# Altium PCB 400342.PcbDoc
Units mm, origin at the board's own origin, x right, y up, seen from the top; angles counter-clockwise.
Board outline 64.3 x 23.1 mm, 2 copper layers (Top Layer, Bottom Layer), stack 1.271 mm thick; 34 components, 50 nets, 191 pads, 142 vias.
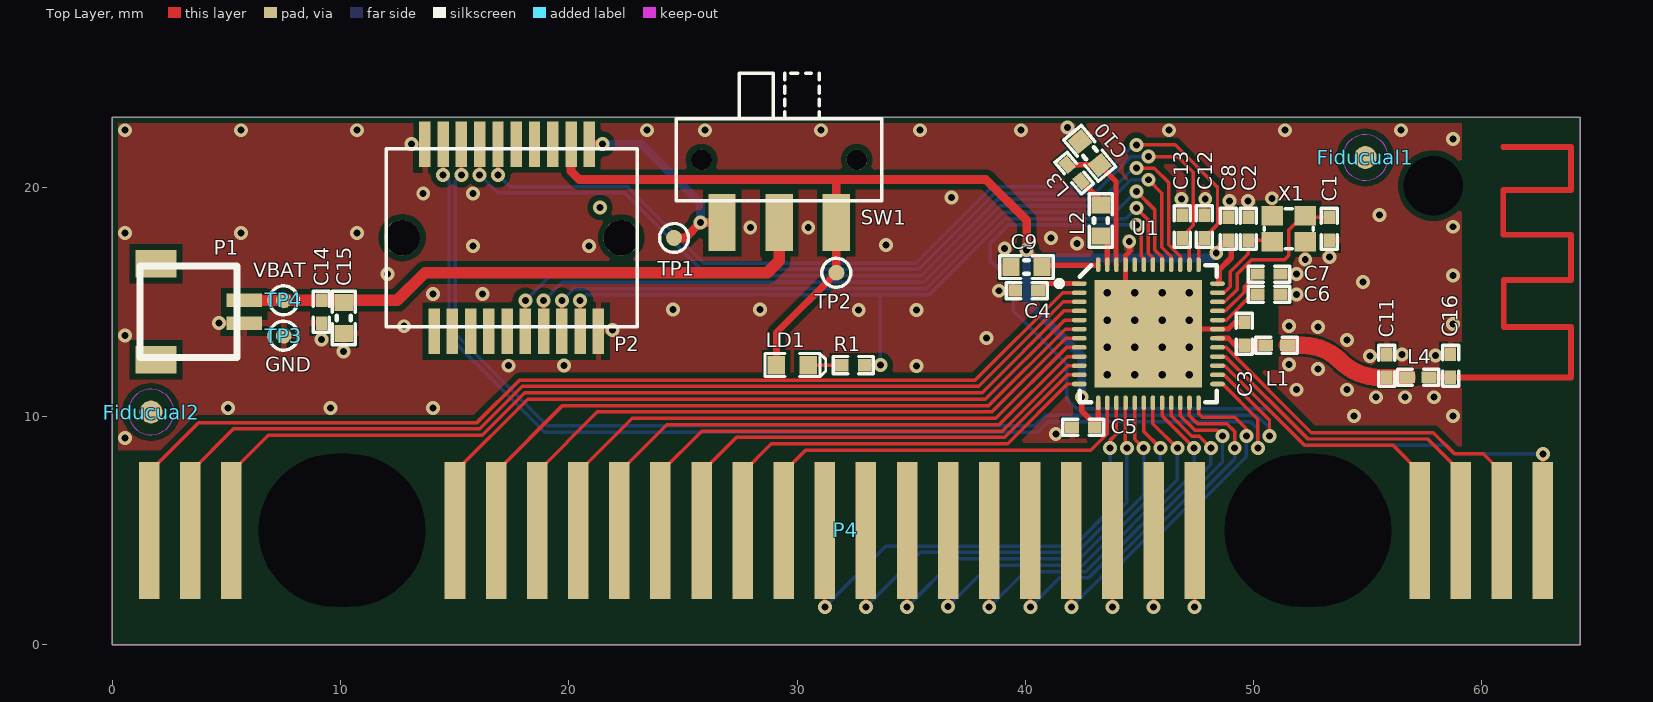
[diagram p0: Top Layer view]
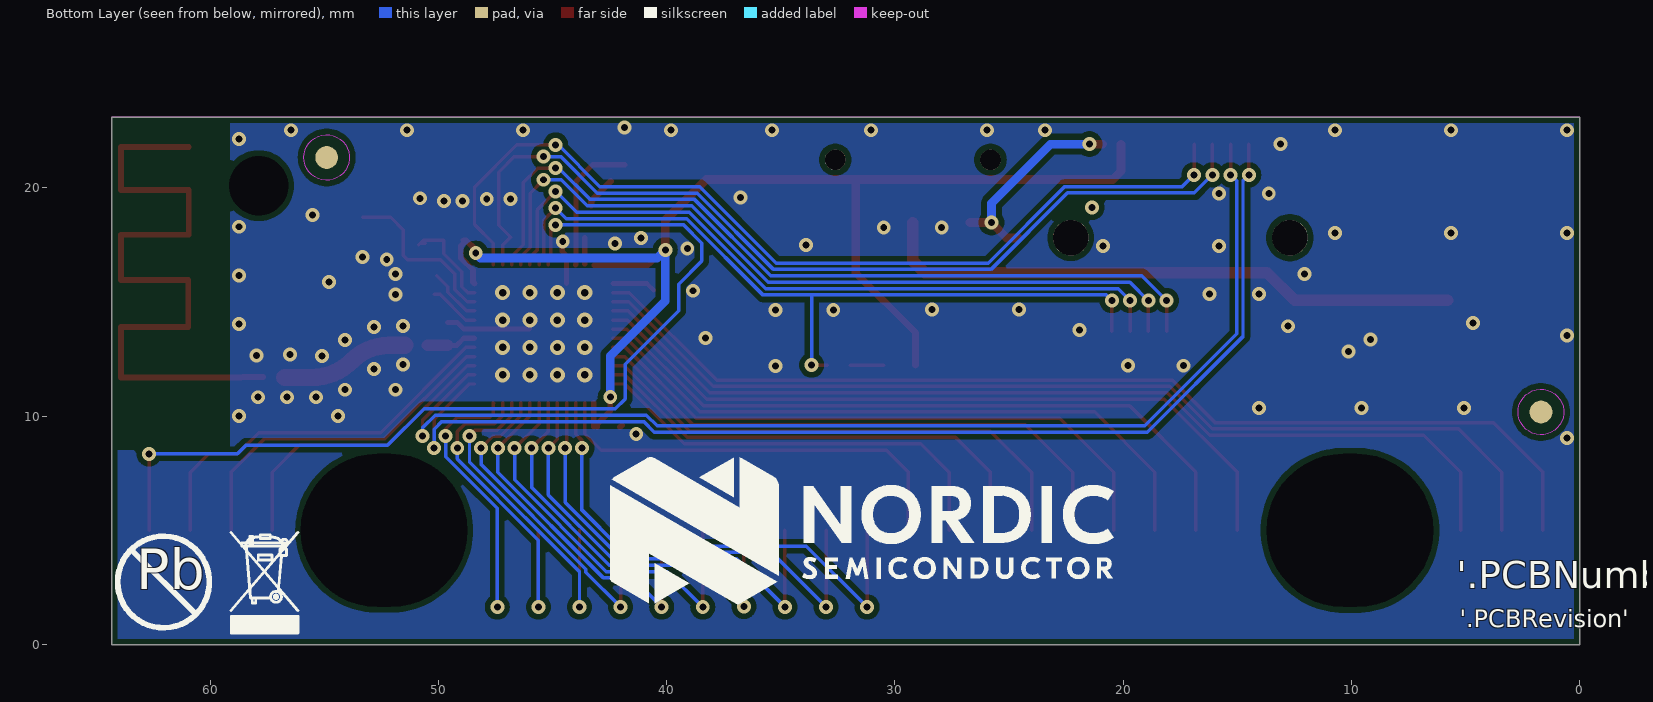
[diagram p1: Bottom Layer view, seen from below]
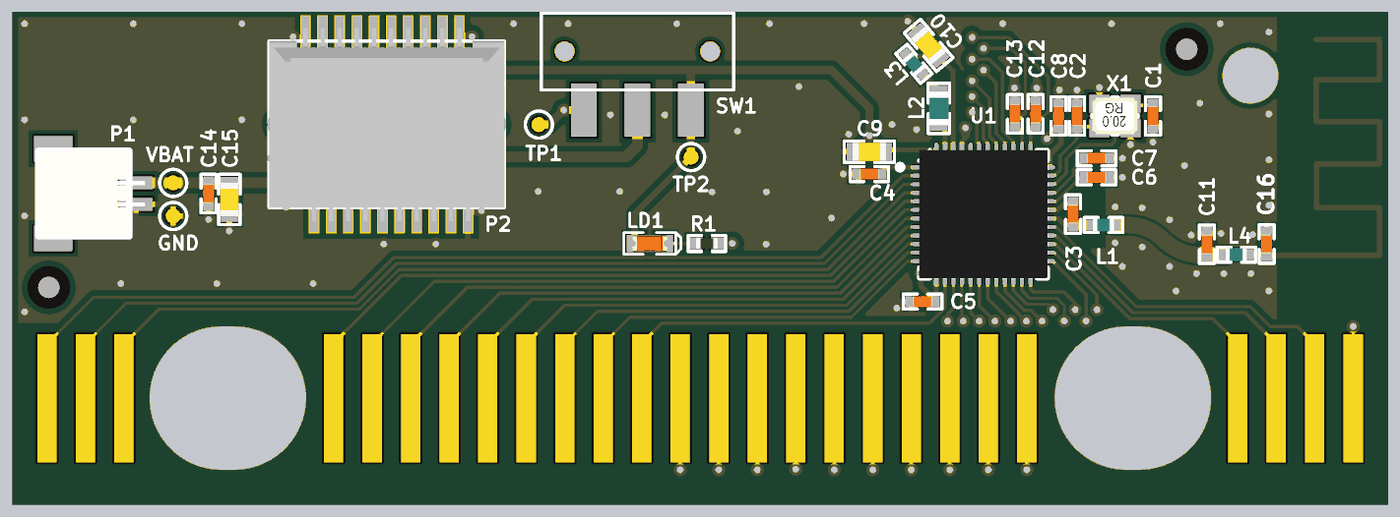
[diagram p2: 3D render of the assembled board from above, using the file's embedded part models]

## Layer stack, top to bottom
Top Solder: solder mask 0.0102, Solder Resist, Dk 3.5
Top Layer: signal copper 0.0356
Dielectric 1: dielectric 1.2, FR-4, Dk 4.8
Bottom Layer: signal copper 0.0356
Bottom Solder: solder mask 0.0102, Solder Resist, Dk 3.5

## Board outline
0,0 0,23.1 64.3,23.1 64.3,0

## Design rules (kind name [scope] priority, off if disabled: settings)
Clearance ANT_Clearance [InNet('ANT') or InNet('RF')] p1: gap=0.127 ignorepadtopadclearanceinfootprint=FALSE
Clearance Polygon_Clearance [(InNamedPolygon('Top_Layer-GND')) or (InNamedPolygon('Bottom_Layer-GND'))] p2: gap=0.254 ignorepadtopadclearanceinfootprint=FALSE except(0: Arc-Hole Track-Hole SMDPad-Hole THPad-Hole Via-Hole Fill-Hole Poly-Hole Region-Hole Text-Hole)
Clearance [All] p3: gap=0.127 ignorepadtopadclearanceinfootprint=FALSE except(0: Arc-Hole Track-Hole SMDPad-Hole THPad-Hole Via-Hole Fill-Hole Poly-Hole Region-Hole Text-Hole)
ComponentClearance [All] p1 off: gap=0.254 collisioncheckmode=3 verticalgap=0.254 showdistances=FALSE
DiffPairsRouting [All] p1: maxlimit=0.254 minlimit=0.19 mostfreqgap=0.193 toplayer_minwidth=0.165 toplayer_maxwidth=0.165 toplayer_prefwidth=0.165 bottomlayer_minwidth=0.165 bottomlayer_maxwidth=0.165 bottomlayer_prefwidth=0.165 maxuncoupledlength=12.7
HoleSize [All] p1: absolutevalues=TRUE maxlimit=7.62 minlimit=0.1 maxpercent=80.000 minpercent=20.000
MinimumAnnularRing [All] p1 off: minimumring=0.152
MinimumSolderMaskSliver [All] p1 off: minsoldermaskwidth=0.254
NetAntennae [All] p1 off: netantennaetolerance=0
PolygonConnect PolygonConnect_1 [isVia and innet(gnd)] p1: connectstyle=Direct reliefconductorwidth=0.254 reliefentries=4 polygonreliefangle="90 Angle" airgapwidth=0.254
PolygonConnect [All] p2: connectstyle=Relief reliefconductorwidth=0.254 reliefentries=4 polygonreliefangle="90 Angle" airgapwidth=0.254
RoutingVias [All] p1: holewidth=0.305 width=0.61 viastyle="Through Hole" minholewidth=0.1 minwidth=0.3 maxholewidth=0.33 maxwidth=1
SilkToSilkClearance [All] p1 off: silktosilkclearance=0.254
SilkToSolderMaskClearance [IsPad] p1 off: minsilkscreentomaskgap=0.254 clearancetoexposedcopper=TRUE
SolderMaskExpansion [All] p1: expansion=0.102
Width [All] p1: maxlimit=20 minlimit=0.1 preferedwidth=0.127 minimp=50.000000 maximp=50.000000 favimp=50.000000
23 further rules are at their usual default settings.

## Components (designator, comment, footprint, x,y, rotation, side; value= is the part's Value field where it differs from the comment)
C1 "12pF" CAPC1005X04L 53.312,18.211 r270 top
C2 "12pF" CAPC1005X04L 49.756,18.211 r90 top
C3 "0.8pF" CAPC1005X04L 49.578,13.613 r270 top
C4 "100nF" CAPC1005X04L 40.053,15.493 r180 top
C5 "100nF" CAPC1005X04L 42.542,9.524 r180 top
C6 "N.C." CAPC1005X04L 50.67,15.341 r180 top
C7 "100pF" CAPC1005X04L 50.67,16.23 r0 top
C8 "100nF" CAPC1005X04L 48.892,18.211 r90 top
C9 "4.7µF" CAPC1608X06L 40.053,16.534 r180 top
C10 "1.0µF" CAPC1608X06L 42.822,21.518 r310 top
C11 "1.2pF" CAPC1005X04L 55.832,12.206 r90 top
C12 "12pF" CAPC1005X04L 47.827,18.311 r90 top
C13 "12pF" CAPC1005X04L 46.862,18.311 r90 top
C14 "100nF" CAPC1005X04L 9.168,14.578 r90 top
C15 "1.0µF" CAPC1608X06L 10.143,14.303 r90 top
C16 "N.C." CAPC1005X04L 58.622,12.214 r270 top
Fiducual1 "Fiducial mark" Fiducial 54.889,21.336 r90 top
Fiducual2 "Fiducial mark" Fiducial 1.702,10.185 r90 top
L1 "3.9nH" INDC1005X04L 51,13.105 r0 top
L2 "10µH" INDC1608X06L 43.304,18.572 r270 top
L3 "15nH" INDC1005X04L 42.137,20.654 r310 top
L4 "1.5nH" INDC1005X04L 57.205,11.714 r0 top
LD1 "L0603R" LED_0603_R 29.794,12.243 r180 top
P1 "HDR-2, 1mm" SM02B-SRSS-TB 5.788,14.579 r270 top
P2 "Card Edge, 0.8mm" 10056847-101LF 17.499,17.82 r180 top
P4 "KBRFBE71_Keyboard_Connector" KBRFBE71_Keyboard_Connector 1.616,5 r0 top locked
R1 "100R" RESC1005X04L 32.461,12.243 r180 top
SW1 "Switch" JS102011SAQN 29.214,21.233 r180 top
TP1 "Ø0.7mm,SMD" TP_SMD_Ø0.7mm 24.608,17.81 r90 top
TP2 "Ø0.7mm,SMD" TP_SMD_Ø0.7mm 31.72,16.286 r90 top
TP3 "GND" TP_SMD_Ø0.7mm 7.516,13.529 r90 top value=Ø0.7mm,SMD
TP4 "VBAT" TP_SMD_Ø0.7mm 7.516,15.078 r90 top value=Ø0.7mm,SMD
U1 "nRF52832-QFAAE0" QFN40P600X600X90-48N 45.387,13.613 r0 top
X1 "32MHz" BT-XTAL_2016 51.534,18.211 r180 top

## Footprints (in the part's own frame and the unit in brackets; to place one, negate y for a bottom-side part, rotate by r counter-clockwise, add the part's x,y. Pads: shape width x height; smd on the part's side, far side on the other; paste and mask are expansions set on the pad)
10056847-101LF [mm]
  rect 0.5x2 smd paste-0.05 mask+0.025: 1(-3.4,-4.1) 2(-2.6,-4.1) 3(-1.8,-4.1) 4(-1,-4.1) 5(-0.2,-4.1) 6(0.6,-4.1) 7(1.4,-4.1) 8(2.2,-4.1) 9(3,-4.1) 10(3.8,-4.1) 11(3.4,4.1) 12(2.6,4.1) 13(1.8,4.1) 14(1,4.1) 15(0.2,4.1) 16(-0.6,4.1) 17(-1.4,4.1) 18(-2.2,4.1) 19(-3,4.1) 20(-3.8,4.1)
  round 1.55 hole 1.55 unplated mask+0: ""(-4.8,0) ""(4.8,0)
  silkscreen extent -5.5,-3.9 5.5,3.9, body extent -5.5,-4.5 5.5,4.53, height 5.28
BT-XTAL_2016 [mm] "Crystal 2.0 x 1.6 mm"
  rect 0.95x0.85 smd: 1(-0.725,-0.575) 2(0.725,-0.575) 3(0.725,0.575) 4(-0.725,0.575)
  silkscreen extent -1.08,-0.88 1.08,0.88, body extent -1.05,-0.85 1.05,0.85, height 0.56
CAPC1005X04L [mm] "Chip Capacitor, 2-Leads, Body 1.0x0.5mm, IPC High Density"
  rect 0.6x0.5 smd: 1(-0.5,0) 2(0.5,0)
  silkscreen extent -0.9,-0.35 0.9,0.35, body extent -0.51,-0.25 0.51,0.25, height 0.5
CAPC1608X06L [mm] "Chip Capacitor, 2-Leads, Body 1.6x0.8mm, IPC High Density"
  rect 0.75x0.8 smd: 1(-0.675,0) 2(0.675,0)
  silkscreen extent -1.17,-0.5 1.17,0.5, body extent -0.8,-0.43 0.8,0.43, height 0.8
Fiducial [mm] "Fiducial Mark"
  round 1 smd paste+0 mask+0.5: 0(0,0)
  round 1 smd far side paste+0 mask+0.5: 0(0,0)
  Top Layer keep-out circle w0.01: c0,0 r1
  Bottom Layer keep-out circle w0.01: c0,0 r1
INDC1005X04L [mm] "Chip Inductor, 2-Leads, Body 1.0x0.5mm, IPC High Density"
  rect 0.65x0.5 smd: 1(-0.475,0) 2(0.475,0)
  silkscreen extent -0.9,-0.35 0.9,0.35, body extent -0.5,-0.3 0.5,0.3, height 0.5
INDC1608X06L [mm] "Chip Inductor, 2-Leads, Body 1.6x0.8mm, IPC High Density"
  rect 0.75x0.8 smd: 1(-0.675,0) 2(0.675,0)
  silkscreen extent -1.17,-0.5 1.17,0.5, body extent -0.8,-0.48 0.8,0.48, height 0.8
JS102011SAQN [mm] "Slide Switches - SPDT, SMD, ON-ON"
  round 0.9 hole 0.9: 0(-3.4,0) 0(3.4,0)
  rect 1.2x2.5 smd: 1(-2.5,2.75) 2(0,2.75) 3(2.5,2.75)
  silkscreen extent -4.5,-3.8 4.5,1.8, body extent -4.52,-3.8 4.52,3.75, height 3.5
KBRFBE71_Keyboard_Connector [mm]
  rect 0.9x6 smd paste-0.508: 1(0,0) 2(1.8,0) 3(3.6,0) 4(13.4,0) 5(15.2,0) 6(17,0) 7(18.8,0) 8(20.6,0) 9(22.4,0) 10(24.2,0) 11(26,0) 12(27.8,0) 13(29.6,0) 14(31.4,0) 15(33.2,0) 16(35,0) 17(36.8,0) 18(38.6,0) 19(40.4,0) 20(42.2,0) 21(44,0) 22(45.8,0) 23(55.654,0) 24(57.454,0) 25(59.254,0) 26(61.054,0)
  rect 0.9x6 on Mech9 paste-0.508: 1(0,0) 2(1.8,0) 3(3.6,0) 4(13.4,0) 5(15.2,0) 6(17,0) 7(18.8,0) 8(20.6,0) 9(22.4,0) 10(24.2,0) 11(26,0) 12(27.8,0) 13(29.6,0) 14(31.4,0) 15(33.2,0) 16(35,0) 17(36.8,0) 18(38.6,0) 19(40.4,0) 20(42.2,0) 21(44,0) 22(45.8,0) 23(55.654,0) 24(57.454,0) 25(59.254,0) 26(61.054,0)
LED_0603_R [mil] "SMD Super Bright LED, RED"
  rect 30x32 smd: 1(-27.5,0) 2(27.5,0)
  silkscreen extent -58,-20 48,20, body extent -32,-16 32,16, height 24
QFN40P600X600X90-48N [mm] "QFN, 48-Leads, Body 6,0x6,0mm (max), Pitch 0,40mm, IPC Medium Density"
  oval 0.65x0.2 smd mask+0.05: 1(-3.025,2.2) 2(-3.025,1.8) 3(-3.025,1.4) 4(-3.025,1) 5(-3.025,0.6) 6(-3.025,0.2) 7(-3.025,-0.2) 8(-3.025,-0.6) 9(-3.025,-1) 10(-3.025,-1.4) 11(-3.025,-1.8) 12(-3.025,-2.2) 25(3.025,-2.2) 26(3.025,-1.8) 27(3.025,-1.4) 28(3.025,-1) 29(3.025,-0.6) 30(3.025,-0.2) 31(3.025,0.2) 32(3.025,0.6) 33(3.025,1) 34(3.025,1.4) 35(3.025,1.8) 36(3.025,2.2)
  oval 0.2x0.65 smd mask+0.05: 13(-2.2,-3.025) 14(-1.8,-3.025) 15(-1.4,-3.025) 16(-1,-3.025) 17(-0.6,-3.025) 18(-0.2,-3.025) 19(0.2,-3.025) 20(0.6,-3.025) 21(1,-3.025) 22(1.4,-3.025) 23(1.8,-3.025) 24(2.2,-3.025) 37(2.2,3.025) 38(1.8,3.025) 39(1.4,3.025) 40(1,3.025) 41(0.6,3.025) 42(0.2,3.025) 43(-0.2,3.025) 44(-0.6,3.025) 45(-1,3.025) 46(-1.4,3.025) 47(-1.8,3.025) 48(-2.2,3.025)
  rect 4.7x4.7 smd: 49(0,0)
  silkscreen extent -4.02,-3 3,3, body extent -3.02,-3.02 3.02,3.02, height 0.86
RESC1005X04L [mm] "Chip Resistor, 2-Leads, Body 1.0x0.5mm, IPC High Density"
  rect 0.6x0.55 smd: 1(-0.5,0) 2(0.5,0)
  silkscreen extent -0.87,-0.38 0.88,0.38, body extent -0.5,-0.25 0.5,0.25, height 0.3
SM02B-SRSS-TB [mm] "JST, SH connector, side entry SMD, 1mm pitch"
  rect 1.2x1.8 smd: 0(-2.1,-3.875) 0(2.1,-3.875)
  rect 0.6x1.55 smd: 1(-0.5,0) 2(0.5,0)
  silkscreen extent -2,-4.57 2,-0.33, body extent -1.99,-4.58 1.99,0.41, height 3
TP_SMD_Ø0.7mm [mm]
  round 0.7 smd paste-5: 1(0,0)
  silkscreen extent -0.63,-0.64 0.63,0.63

## Part data
C1 C2 C12 C13: library part C0402-12p, "Capacitor, NP0, ±2%", Part number IPS=00000002398, Artikkelnr Noca=20029159, ComponentLink1Description=Datasheet, ComponentLink2Description="Supplier link", Footprint Doc=0402, LatestRevisionDate=2011-05-11, Note=50V, Part Number=C0402-12p, Pin Count=2, Published=2009-05-08, Publisher="Nordic Semiconductor"
C3: library part C0402-0.8p, "Capacitor, NP0, ±5%", Part number IPS=00000007782, Artikkelnr Noca=20029147, ComponentLink1Description=Datasheet, ComponentLink2Description="Supplier link", Footprint Doc=0402, LatestRevisionDate=2012-11-21, Note=50V, Part Number=C0402-0.8p, Pin Count=2, Published=2009-05-08, Publisher="Nordic Semiconductor"
C4 C5 C8 C14: library part C0402-100n, "Capacitor, X7R, ±10%", Part number IPS=00000005296, Artikkelnr Noca=20039200, ComponentLink1Description=Datasheet, ComponentLink2Description="Supplier link", Footprint Doc=0402, LatestRevisionDate=2009-11-23, Note=16V, Part Number=C0402-100n, Pin Count=2, Published=2009-05-08, Publisher="Nordic Semiconductor"
C6 C16: library part C0402-N.C., "Not mounted", Part number IPS=N.A., Artikkelnr Noca=N.A., Assembly="Not mounted", ComponentLink1Description=Datasheet, ComponentLink2Description="Supplier link", Footprint Doc=0402, LatestRevisionDate=2009-05-08, Note="Chip Cap", Part Number=C0402-N.C., Pin Count=2, Published=2009-05-08, Publisher="Nordic Semiconductor"
C7: library part C0402-100p, "Capacitor, NP0, ±5%", Part number IPS=00000002361, Artikkelnr Noca=20029135, ComponentLink1Description=Datasheet, ComponentLink2Description="Supplier link", Footprint Doc=0402, LatestRevisionDate=2009-05-08, Note=50V, Part Number=C0402-100p, Pin Count=2, Published=2009-05-08, Publisher="Nordic Semiconductor"
C9: library part C0603-4µ7, "Capacitor, X5R, ±10%", Part number IPS=00000007783, Artikkelnr Noca=20069060, ComponentLink1Description=Datasheet, ComponentLink2Description="Supplier link", Footprint Doc=0603, LatestRevisionDate=2009-11-23, Note=6.3V, Part Number=C0603-4µ7, Pin Count=2, Published=2009-05-08, Publisher="Nordic Semiconductor"
C10 C15: library part C0603-1µ0, "Capacitor, X7R, ±10%", Part number IPS=00000000616, Artikkelnr Noca=20039282, ComponentLink1Description=Datasheet, ComponentLink2Description="Supplier link", Footprint Doc=0603, LatestRevisionDate=2013-06-05, Note=16V, Part Number=C0603-1µ0, Pin Count=2, Published=2009-05-08, Publisher="Nordic Semiconductor"
C11: library part C0402-1.2p, "Capacitor, NP0, ±0.1pF", Part number IPS=00000005410, Artikkelnr Noca=20029157, ComponentLink1Description=Datasheet, ComponentLink2Description="Supplier link", Footprint Doc=0402, LatestRevisionDate=2011-05-11, Note=50V, Part Number=C0402-1.2p, Pin Count=2, Published=2009-05-08, Publisher="Nordic Semiconductor"
Fiducual1 Fiducual2: library part Fid-Mark, "Fiducial Mark", Part number IPS=N.A., Artikkelnr Noca=N.A., ComponentLink1Description=Datasheet, ComponentLink2Description="Supplier link", Footprint Doc=Fiducial, LatestRevisionDate=2009-12-12, Part Number=Fid-Mark, Pin Count=1, Published=2009-12-12, Publisher="Nordic Semiconductor"
L1: library part L0402-3n9, "Inductor, 170mA, ±0.1nH", Manufacturer=Murata, Manufacturer Part Number=LQP15MN3N9B02D, Part number IPS=00000007793, Supplier Part Number 1=490-1131-1-ND, Artikkelnr Noca=33029151, ComponentLink1Description=Datasheet, ComponentLink2Description="Supplier link", Footprint Doc=0402, HelpURL=http://search.murata.co.jp/Ceramy/image/img/PDF/ENG/L0075S0084LQP15M.pdf, LatestRevisionDate=2012-09-19, Note="High frequency chip inductor ±5%", Part Number=L0402-3n9, Pin Count=2, Published=2009-05-08, Publisher="Nordic Semiconductor", Supplier 1=Digi-Key
L2: library part L0603-10µ, "Inductor, 80mA, ±10%", Manufacturer="Taiyo Yuden", Manufacturer Part Number=LBMF1608T100K, Part number IPS=00000007794, Supplier Part Number 1=587-1714-1-ND, Artikkelnr Noca=33029314, ComponentLink1Description=Datasheet, ComponentLink2Description="Supplier link", Footprint Doc=0603, HelpURL=http://www.yuden.co.jp/ut/product/pdf/elb2_e.pdf, LatestRevisionDate=2012-09-19, Note="LBMF1608T100K 10µH 80mA 0603", Part Number=L0603-10µ, Pin Count=2, Published=2010-02-24, Publisher="Nordic Semiconductor", Supplier 1=Digi-Key, Supplier 2=Farnell, Supplier Part Number 2=178-6105
L3: library part L0402-15n, "Inductor, 320mA, ±5%", Manufacturer="Taiyo Yuden", Manufacturer Part Number=HK100515NJ-T, Part number IPS=00000001262, Supplier Part Number 1=587-1521-1-ND, Artikkelnr Noca=33029323, ComponentLink1Description=Datasheet, ComponentLink2Description="Supplier link", Footprint Doc=0402, HelpURL=http://www.yuden.co.jp/productdata/catalog/en/mlci04_e.pdf, LatestRevisionDate=2012-09-19, Note="High frequency chip inductor ±10%", Part Number=L0402-15n, Pin Count=2, Published=2010-07-12, Publisher="Nordic Semiconductor", Supplier 1=Digi-Key, Supplier 2=Farnell, Supplier Part Number 2=658-1328
L4: library part L0402-1n5, "Inductor, 280mA, ±0.1nH", Manufacturer=Murata, Manufacturer Part Number=LQP15MN1N5B02D, Part number IPS=N.A., Supplier Part Number 1=490-1126-1-ND, Artikkelnr Noca=N.A., ComponentLink1Description=Datasheet, ComponentLink2Description="Supplier link", Footprint Doc=0402, HelpURL=http://search.murata.co.jp/Ceramy/image/img/PDF/ENG/L0075S0084LQP15M.pdf, LatestRevisionDate=2012-09-19, Note="High frequency chip inductor ±5%", Part Number=L0402-1n5, Pin Count=2, Published=2009-05-08, Publisher="Nordic Semiconductor", Supplier 1=Digi-Key
LD1: library part EL19-21SURC, "LED 0603, EL19-21SURC", Manufacturer=Everlight, Manufacturer Part Number=EL-19-21SURC/S530-A2/TR8, Part number IPS=N.A., Supplier Part Number 1=638-192SURCS530-A2, Artikkelnr Noca=13019043, ComponentLink1Description=Datasheet, ComponentLink2Description="Supplier link", Footprint Doc=0603, HelpURL=http://media.digikey.com/pdf/Data%20Sheets/Everlight%20PDFs/19-21SURC,S530-A3,TR8.pdf, LatestRevisionDate=2013-06-04, Note="39 mcd @ 20 mA", Part Number=EL19-21SURC, Pin Count=2, Published=2009-05-18, Publisher="Nordic Semiconductor", Supplier 1=Mouser
P1: library part SM02B-SRSS-TB, "1.0mm pitch connector side entry SMD", Manufacturer=JST, Manufacturer Part Number=SM02B-SRSS-TB(LF)(SN), Part number IPS=00000007791, Supplier Part Number 1=455-1802-1-ND, Artikkelnr Noca=55010030, ComponentLink1Description=Datasheet, ComponentLink2Description="Supplier link", Footprint Doc=SM02B-SRSS-TB, HelpURL=http://www.jst-mfg.com/product/pdf/eng/eSH.pdf, LatestRevisionDate=2016-06-20, Note="JST, Header", Part Number=SM02B-SRSS-TB, Pin Count=2, Published=2016-06-20, Publisher="Nordic Semiconductor", Supplier 1=Digi-Key
P2: library part 10056847-101LF, "0.8mm pitch, dual edge, right angle, SMD, card edge connector", Manufacturer=FCI, Part number IPS=N.A., Supplier Part Number 1=609-4943-1-ND, Artikkelnr Noca=N.A., ComponentLink1Description=Datasheet, ComponentLink1URL=https://www.amphenol-icc.com/media/wysiwyg/files/drawing/10056847.pdf, ComponentLink2Description="Supplier link", Footprint Doc=10056847-101LF, LatestRevisionDate=2018-05-07, Manufacturer Part Number=10056847-101LF, Part Number=10056847-101LF, Pin Count=20, Published=2018-05-07, Publisher="Nordic Semiconductor", Supplier 1=Digi-Key
P4: "KBRFBE71 Keyboard Connector", Part number IPS=N.A., Artikkelnr Noca=N.A., ComponentLink1Description=Datasheet, Footprint Doc=KBRFBE71_Keyboard_Connector, LatestRevisionDate=2018-12-12, Note="KBRFBE71 Keyboard Connector", Part Number=KBRFBE71_Keyboard_Connector, Pin Count=26, Published=2018-12-12, Publisher="Nordic Semiconductor"
R1: library part R0402-100, "Resistor, ±1%, 0.063W", Part number IPS=00000002811, Supplier Part Number 1=173-8837, Artikkelnr Noca=27049049, ComponentLink1Description=Datasheet, ComponentLink2Description="Supplier link", Footprint Doc=0402, LatestRevisionDate=2009-11-23, Note="Chip Res 1%", Part Number=R0402-100, Pin Count=2, Published=2009-05-08, Publisher="Nordic Semiconductor", Supplier 1=Farnell
SW1: library part JS102011SAQN, "SMD slide Switch (ON-ON)", Manufacturer="C&K Components", Part number IPS=N.A., Supplier Part Number 1=401-1999-1-ND, Artikkelnr Noca=50019064, ComponentLink1Description=Datasheet, ComponentLink2Description="Supplier link", Footprint Doc=JS102011SAQN, HelpURL=http://www.ck-components.com/14398/js_14july11.pdf/, LatestRevisionDate=2011-08-15, Manufacturer Part Number=JS102011SAQN, Part Number=JS102011SAQN, Pin Count=3, Published=2011-08-15, Publisher="Nordic Semiconductor", Supplier 1=Digi-Key, Supplier 2=Mouser, Supplier Part Number 2=611-JS102011SAQN
TP1 TP2 TP3 TP4: library part TP_SMD_Ø0.7MM, "0.7mm circular SMD testpad", Manufacturer="Nordic Semiconductor", Part number IPS=N.A., Artikkelnr Noca=N.A., ComponentLink1Description=Datasheet, ComponentLink2Description="Supplier link", Footprint Doc=TP_SMD_Ø0.7mm, LatestRevisionDate=2017-12-14, Part Number=TP_SMD_Ø0.7MM, Pin Count=1, Published=2017-12-14, Publisher="Nordic Semiconductor"
U1: "Multi-protocol Bluetooth Low Energy, ANT and 2.4GHz proprietary system-on-chip", Manufacturer="Nordic Semiconductor", Part number IPS=N.A., Artikkelnr Noca=N.A., ComponentLink1Description=Datasheet, ComponentLink2Description="Supplier link", Footprint Doc=QFN-48, LatestRevisionDate=2017-10-18, Manufacturer Part Number=nRF52832-QFAAE0, Part Number=nRF52832-QFAAE0, Pin Count=48, Published=2017-10-18, Publisher="Nordic Semiconductor", Supplier 1="Nordic Semiconductor", Supplier Part Number 1=nRF52832-QFAAE0
X1: library part XTAL_SMD2016_32MHz_8pF_KDS, "XTAL SMD 2016, 32MHz, Cl=8pF, Tol: ±10ppm, Stab: ±20ppm", Manufacturer=KDS, Manufacturer Part Number=DSX211G, Part number IPS=N.A., Artikkelnr Noca=N.A., ComponentLink1Description=Datasheet, ComponentLink2Description="Supplier link", Footprint Doc=XTAL_2016, HelpURL=http://ftp.kds.info/products/DSX210GE_211G_car_en.pdf, LatestRevisionDate=2017-06-09, Note="XTAL SMD 32.000MHz", Part Number=XTAL_SMD2016_32MHz_8pF_KDS, Pin Count=4, Published=2017-06-09, Publisher="Nordic Semiconductor"

## Free pads (board coordinates)
  rect 1.524x1.524 hole 6.7 slot 7.3 at 0 deg: ""(10.068,5.003) ""(52.372,5.003)
  round 1.524 hole 2.6: ""(57.866,20.1)

## Via types
v1: diameter 0.61, hole 0.305, Top Layer to Bottom Layer, tented both sides, 126 vias
v2: diameter 0.66, hole 0.33, Top Layer to Bottom Layer, tented both sides, 16 vias

## Nets (pads, with @x,y where several pads share a name; then routed paths per layer and width w, separated by ;. In a path a pad name is that pad's centre, name@x,y a point inside that pad or via, vN(x,y) a via of type N, cw(c..) or ccw(c..) an arc to the next point about the centre after c; other vN are vias at no path point)
ANT: C16.2 L4.2 | length 31
  Top Layer w0.254: L4.2@57.679,11.723 C16.2@58.576,11.723 ; C16.2@58.626,11.698 63.896,11.698 63.896,13.915 60.953,13.915 60.953,15.973 63.896,15.973 63.896,17.954 60.927,17.954 60.927,19.91 63.896,19.91 63.896,21.789 60.932,21.789
DEC1: C4.1 U1.1 | length 1.9
  Top Layer w0.203: C4.1@40.557,15.512 40.858,15.813 U1.1
DEC2: C6.2 U1.32 | length 2.2
  Top Layer w0.152: U1.32 48.798,14.213 49.925,15.341 C6.2@50.188,15.341
DEC3: C7.1 U1.33 | length 2.4
  Top Layer w0.152: U1.33 48.767,14.613 49.578,15.424 49.578,15.676 C7.1@50.062,16.16
DEC4: C10.2 L3.1 U1.46 | length 6.1
  Top Layer w0.229: L3.1 C10.2@43.239,21.018 ; C10.2 43.971,20.286 43.971,16.654 U1.46
GND: C1.2 C2.2 C3.1 C4.2 C5.2 C6.1 C7.2 C8.2 C9.2 C10.1 C11.2 C12.2 C13.2 C14.1 C15.1 C16.1 P1.2 P2.10 P2.20 TP3.1 U1.31 U1.45 U1.49 X1.2 X1.4 | length 5.7
  Top Layer w0.229: U1.49@44.387,15.813 U1.45 44.387,17.033 44.574,17.22 v1@44.574,17.652 ; U1.49@46.005,13.817 48.886,13.817 49.173,14.104 C3.1@49.586,14.104
  Top Layer w0.254: C5.2@41.959,9.607 C5.2
  other v1: 0.569,9.041 41.331,9.219 54.385,10.013 58.728,10.016 5.065,10.362 9.56,10.362 14.056,10.362 55.352,10.834 56.622,10.834 57.892,10.834 51.883,11.163 54.082,11.163 52.812,12.074 17.356,12.214 19.794,12.216 35.233,12.204 51.542,12.267 55.098,12.635 57.966,12.655 56.493,12.706 10.133,12.834 9.168,13.367 54.082,13.347 38.291,13.437 0.569,13.54 21.922,13.782 52.812,13.906 12.786,13.944 51.542,13.957 58.728,14.033 4.672,14.078 32.7,14.655 35.24,14.655 24.572,14.68 28.382,14.68 51.881,15.341 14.054,15.363 16.213,15.363 38.841,15.498 54.791,15.887 58.728,16.167 12.065,16.23 51.881,16.23 52.259,16.874 53.312,16.982 39.095,17.353 15.809,17.449 20.889,17.449 33.894,17.5 42.263,17.576 44.549,17.652 41.116,17.811 0.569,18.033 5.649,18.033 10.729,18.033 27.95,18.262 30.49,18.262 58.728,18.3 55.502,18.808 48.944,19.428 49.757,19.428 46.836,19.522 47.878,19.522 50.809,19.548 36.764,19.582 13.624,19.76 15.809,19.76 13.116,21.919 58.728,22.136 0.569,22.529 5.649,22.529 10.729,22.529 23.429,22.529 25.969,22.529 31.049,22.529 35.392,22.529 39.812,22.529 46.289,22.529 51.369,22.529 56.449,22.529 41.85,22.645
  other v2: 43.587,11.813 44.787,11.813 45.987,11.813 47.187,11.813 43.587,13.013 44.787,13.013 45.987,13.013 47.187,13.013 43.587,14.213 44.787,14.213 45.987,14.213 47.187,14.213 43.587,15.413 44.787,15.413 45.987,15.413 47.187,15.413
NetC3_2: C3.2 L1.1 U1.30 | length 2.2
  Top Layer w0.229: U1.30 48.887,13.413 49.197,13.104 C3.2@49.586,13.104
  Top Layer w0.508: C3.2@49.578,13.109 L1.1@50.475,13.109
NetL2_1: L2.1 L3.2 | length 1.4
  Top Layer w0.279: L3.2 43.304,19.428 L2.1
NetL2_2: L2.2 U1.47 | length 1.1
  Top Layer w0.229: U1.47@43.587,16.669 L2.2@43.587,17.817
NetLD1_1: LD1.1 R1.2 | length 1.5
  Top Layer w0.152: LD1.1 R1.2
P0.25: C12.1 P2.6 U1.37 | length 41.1
  Top Layer w0.152: v1(16.899,20.574) P2.6 ; v1(44.858,21.884) 46.56,21.884 48.415,20.029 48.415,18.399 47.587,17.571 U1.37
  Bottom Layer w0.152: v1(16.899,20.574) 17.411,20.062 22.555,20.062 25.908,16.709 35.2,16.709 38.546,20.055 42.921,20.055 44.749,21.884 v1(44.858,21.884)
P0.26: C13.1 P2.7 U1.38 | length 41
  Top Layer w0.152: v1@16.099,20.574 P2.7 ; v1(45.391,21.376) 46.666,21.376 47.35,20.693 47.35,18.367 C13.1@46.819,17.836 ; C13.1 47.187,17.486 U1.38
  Bottom Layer w0.152: v1(16.097,20.574) 16.889,19.783 22.439,19.783 25.792,16.43 35.316,16.43 38.662,19.776 43.036,19.776 44.637,21.376 v1(45.391,21.376)
P0.27: P2.16 U1.39 | length 36
  Top Layer w0.152: P2.16 v1(18.099,15.067) ; v1(44.858,20.868) 45.645,20.868 46.274,20.239 46.274,17.518 46.787,17.006 U1.39
  Bottom Layer w0.152: v1(18.099,15.067) 19.183,16.151 35.432,16.151 38.778,19.497 43.352,19.497 44.724,20.868 v1(44.858,20.868)
P0.28: P2.17 U1.40 | length 34.2
  Top Layer w0.152: P2.17 v1(18.899,15.067) ; v1(45.391,20.36) 45.975,19.777 45.975,17.394 46.387,16.982 U1.40
  Bottom Layer w0.152: v1@18.874,15.041 v1(18.899,15.067) 19.704,15.871 35.547,15.871 38.893,19.217 43.468,19.217 44.611,20.36 v1(45.391,20.36)
P0.29: P2.18 U1.41 | length 32.2
  Top Layer w0.152: P2.18 v1(19.699,15.067) ; v1(44.858,19.852) 45.676,19.035 45.676,17.27 45.987,16.959 U1.41
  Bottom Layer w0.152: v1(19.699,15.067) 20.224,15.592 35.663,15.592 39.009,18.938 43.944,18.938 v1(44.858,19.852)
P0.30: P2.19 R1.1 U1.42 | length 33.9
  Top Layer w0.152: P2.19 v1(20.499,15.067) ; R1.1 v1(33.647,12.243) ; v1(44.858,19.116) 45.376,18.597 45.376,17.146 45.587,16.936 U1.42
  Bottom Layer w0.152: v1(20.499,15.067) 20.745,15.312 33.668,15.312 ; v1(33.647,12.243) 33.647,15.292 33.668,15.312 ; v1(44.858,19.116) 44.401,18.658 39.125,18.658 35.779,15.312 33.668,15.312
R0: P4.26@62.67,5 U1.43 | length 41.7
  Top Layer w0.152: v1@45.077,18.185 45.077,17.022 45.187,16.912 U1.43 ; P4.26@62.67,5 v1(62.67,8.353)
  Bottom Layer w0.152: v1(44.858,18.379) 39.255,18.379 38.459,17.582 38.459,16.802 39.475,15.786 39.475,14.617 41.812,12.28 41.812,10.757 42.242,10.327 50.622,10.327 52.225,8.724 58.425,8.724 58.797,8.353 v1(62.67,8.353)
R1: P4.25@60.87,5 U1.29 | length 17.3
  Top Layer w0.152: U1.29 48.798,13.013 52.528,9.283 57.866,9.283 58.797,8.353 60.053,8.353 60.87,7.537 P4.25@60.87,5
R2: P4.24@59.07,5 U1.28 | length 15.3
  Top Layer w0.152: U1.28 48.767,12.613 52.377,9.004 57.626,9.004 59.07,7.56 P4.24@59.07,5
R3: P4.23@57.27,5 U1.27 | length 13.3
  Top Layer w0.152: U1.27 48.736,12.213 52.225,8.724 56.1,8.724 57.27,7.555 P4.23@57.27,5
R4: P4.21@45.616,5 U1.23 | length 15.3
  Top Layer w0.152: v1(45.616,1.647) P4.21@45.616,5 ; U1.23 47.187,10.03 47.541,9.676 48.823,9.676 49.169,9.33 v1(49.169,8.61)
  Bottom Layer w0.152: v1(45.616,1.647) 45.616,4.575 49.169,8.128 v1(49.169,8.61)
R5: P4.22@47.416,5 U1.24 | length 14.9
  Top Layer w0.152: v1(47.416,1.647) P4.22@47.416,5 ; U1.24@47.573,10.574 U1.24 47.587,10.115 47.746,9.956 49.169,9.956 49.677,9.448 v1(49.677,9.143)
  Bottom Layer w0.152: v1(47.416,1.647) 47.416,5.968 49.677,8.229 v1(49.677,9.143)
R6: P4.20@43.816,5 U1.22 | length 15.6
  Top Layer w0.152: v1(43.816,1.647) P4.20@43.816,5 ; U1.22 46.787,10.026 47.416,9.397 48.381,9.397 v1(48.635,9.143)
  Bottom Layer w0.147: v1(43.816,1.647) 43.816,3.182 48.635,8.001 v1(48.635,9.143)
R7: P4.19@42.016,5 U1.21 | length 15.7
  Top Layer w0.152: v1(42.016,1.647) P4.19@42.016,5 ; U1.21 46.387,10.016 47.286,9.118 47.619,9.118 v1(48.127,8.61)
  Bottom Layer w0.152: v1(42.016,1.647) 43.539,3.17 43.539,3.297 48.127,7.886 v1(48.127,8.61)
RF: C11.1 L1.2 L4.1 | length 5.6
  Top Layer w0.762: L1.2 52.155,13.105 cw(c52.155,10.814) 53.775,12.434 ccw(c55.553,14.213) 55.553,11.698 L4.1@56.729,11.698
S0: P4.18@40.216,5 U1.20 | length 16.6
  Top Layer w0.152: v1(40.216,1.647) P4.18@40.216,5 ; U1.20 45.987,10.013 v1(47.391,8.61)
  Bottom Layer w0.152: v1(40.216,1.647) 41.486,2.917 42.764,2.917 47.391,7.544 v1(47.391,8.61)
S1: P4.12@29.416,5 U1.14 | length 18.8
  Top Layer w0.152: P4.12@29.416,5 29.416,7.56 30.369,8.513 42.869,8.513 43.587,9.231 U1.14
S2: P4.10@25.816,5 U1.11 | length 20.9
  Top Layer w0.152: P4.10@25.816,5 25.816,7.541 27.346,9.072 39.103,9.072 41.845,11.813 U1.11
S3: P4.9@24.016,5 U1.10 | length 22.8
  Top Layer w0.152: P4.9@24.016,5 24.016,7.545 25.822,9.352 38.988,9.352 41.85,12.213 U1.10
S4: P4.8@22.216,5 U1.9 | length 24.8
  Top Layer w0.152: P4.8@22.216,5 22.216,7.548 24.298,9.631 38.844,9.631 41.826,12.613 U1.9
S5: P4.7@20.416,5 U1.8 | length 26.8
  Top Layer w0.152: P4.7@20.416,5 20.416,7.552 22.774,9.91 38.7,9.91 41.803,13.013 U1.8
S6: P4.6@18.616,5 U1.7 | length 28.7
  Top Layer w0.152: P4.6@18.616,5 18.616,7.555 21.25,10.19 38.539,10.19 41.763,13.413 U1.7
S7: P4.4@15.016,5 U1.5 | length 32.7
  Top Layer w0.152: P4.4@15.016,5 15.016,7.562 18.202,10.749 38.248,10.749 41.713,14.213 U1.5
S8: P4.5@16.816,5 U1.6 | length 30.7
  Top Layer w0.152: P4.5@16.816,5 16.816,7.558 19.726,10.469 38.395,10.469 41.739,13.813 U1.6
S9: P4.16@36.616,5 U1.18 | length 18.8
  Top Layer w0.152: v1(36.616,1.673) P4.16@36.616,5 ; U1.18@45.19,10.585 U1.18 45.191,9.331 v1(45.917,8.61)
  Bottom Layer w0.152: v1(36.616,1.673) 38.419,3.476 42.51,3.476 45.917,6.884 v1(45.917,8.61)
S10: P4.1@1.616,5 U1.2 | length 46.6
  Top Layer w0.152: P4.1@1.616,5 1.616,7.548 3.792,9.724 15.982,9.724 17.844,11.587 37.809,11.587 41.635,15.413 U1.2
S11: P4.2@3.416,5 U1.3 | length 44.6
  Top Layer w0.152: P4.2@3.416,5 3.416,7.544 5.316,9.445 16.097,9.445 17.96,11.307 37.96,11.307 41.666,15.013 U1.3
S12: P4.14@33.016,5 U1.16 | length 21.1
  Top Layer w0.152: v1(33.016,1.647) P4.14@33.016,5 ; U1.16@44.381,10.588 44.381,8.673 v1(44.444,8.61)
  Bottom Layer w0.152: v1(33.016,1.647) 35.403,4.035 42.256,4.035 44.444,6.223 v1(44.444,8.61)
S13: P4.15@34.816,5 U1.17 | length 19.9
  Top Layer w0.152: v1(34.816,1.647) P4.15@34.816,5 ; U1.17 44.793,8.995 v1(45.181,8.61)
  Bottom Layer w0.152: v1(34.816,1.647) 36.924,3.755 42.383,3.755 45.181,6.553 v1(45.181,8.61)
S14: P4.13@31.216,5 U1.15 | length 22.4
  Top Layer w0.152: v1(31.216,1.647) P4.13@31.216,5 ; v1(43.708,8.61) 43.708,8.94 43.987,9.219 U1.15
  Bottom Layer w0.152: v1(31.216,1.647) 33.883,4.314 42.129,4.314 43.708,5.893 v1(43.708,8.61)
S15: P4.11@27.616,5 U1.12 | length 18.9
  Top Layer w0.152: P4.11@27.616,5 27.616,7.538 28.87,8.793 39.219,8.793 41.84,11.413 U1.12
S16: P4.17@38.416,5 U1.19 | length 17.7
  Top Layer w0.152: v1(38.416,1.647) P4.17@38.416,5 ; U1.19 45.587,9.677 v1(46.654,8.61)
  Bottom Layer w0.152: v1(38.416,1.647) 39.965,3.197 42.637,3.197 46.654,7.214 v1(46.654,8.61)
S17: P4.3@5.216,5 U1.4 | length 42.6
  Top Layer w0.152: P4.3@5.216,5 5.216,7.541 6.84,9.166 16.213,9.166 18.075,11.028 38.104,11.028 41.69,14.613 U1.4
SWDCLK: P2.9 U1.25 | length 50.5
  Top Layer w0.152: v1(14.499,20.574) P2.9 ; U1.25 48.637,11.413 50.185,9.866 v1(50.185,8.61)
  Bottom Layer w0.152: v1(14.499,20.574) 14.753,20.32 14.753,13.492 18.944,9.301 40.533,9.301 41.001,9.769 49.854,9.769 50.185,9.438 v1(50.185,8.61)
SWDIO: P2.8 U1.26 | length 50.3
  Top Layer w0.152: v1(15.299,20.574) P2.8 ; U1.26 48.702,11.813 50.693,9.823 v1(50.693,9.143)
  Bottom Layer w0.152: v1(15.299,20.574) 15.033,20.308 15.033,13.608 19.06,9.58 40.417,9.58 40.884,10.048 50.134,10.048 50.693,9.489 v1(50.693,9.143)
VBAT: C14.2 C15.2 P1.1 SW1.2 TP4.1 | length 25.8
  Top Layer w0.508: P1.1 10.143,15.079 12.488,15.079 13.702,16.293 28.688,16.293 29.214,16.818 SW1.2
VDD_nRF: C5.1 C8.1 C9.1 LD1.2 P2.2 SW1.1 TP2.1 U1.13 U1.36 U1.48 | length 57.4
  Top Layer w0.229: v1@40.14,17.29 40.732,16.698 40.817,16.613 U1.48@43.177,16.613 ; C5.1@43.187,9.524 U1.13
  Top Layer w0.254: v1(42.467,10.843) 42.467,10.234 43.042,9.659 C5.1 ; v1(48.36,17.143) 48.36,17.289 48.782,17.711 C8.1 ; U1.36 48.486,15.887 48.486,16.405 49.021,16.939 49.021,17.455 C8.1@48.867,17.609
  Top Layer w0.305: LD1.2 29.096,13.661 TP2.1
  Top Layer w0.381: P2.2 20.099,20.732 20.464,20.367 31.723,20.367 ; TP2.1@31.714,16.293 SW1.1 31.714,20.357 31.723,20.367 ; v1(40.057,17.29) 40.057,18.58 38.27,20.367 31.723,20.367
  Bottom Layer w0.381: v1(42.467,10.843) 42.467,12.642 40.057,15.052 40.057,16.933 v1(40.057,17.29) 40.414,16.933 48.151,16.933 v1(48.36,17.143)
VDD_nRF': P2.1 SW1.3 TP1.1 | length 9.2
  Top Layer w0.381: P2.1 v1(21.483,21.92) ; TP1.1 25.1,17.81 v1(25.774,18.483) SW1.3
  Bottom Layer w0.381: v1(21.483,21.92) 23.186,21.92 25.774,19.333 v1(25.774,18.483)
XC1: C1.1 U1.34 X1.1 | length 7.5
  Top Layer w0.152: U1.34 48.736,15.013 49.27,15.548 49.27,16.05 49.27,16.216 49.919,16.865 51.356,16.865 51.534,17.042 51.534,18.16 52.085,18.711 C1.1
XC2: C2.1 U1.35 X1.3 | length 4.5
  Top Layer w0.152: U1.35 48.702,15.413 48.966,15.677 48.966,16.335 49.756,17.125 C2.1@49.756,17.659 ; C2.1 C2.1@49.756,17.659 ; X1.3@50.58,17.576 X1.3@50.797,17.576 ; X1.3@50.862,17.511 50.662,17.711 49.808,17.711 C2.1@49.756,17.659
pads on no net: Fiducual1.0 Fiducual2.0 P1.0 P2. P2.3 P2.4 P2.5 P2.11 P2.12 P2.13 P2.14 P2.15 P4.1@1.616,5 P4.2@3.416,5 P4.3@5.216,5 P4.4@15.016,5 P4.5@16.816,5 P4.6@18.616,5 P4.7@20.416,5 P4.8@22.216,5 P4.9@24.016,5 P4.10@25.816,5 P4.11@27.616,5 P4.12@29.416,5 P4.13@31.216,5 P4.14@33.016,5 P4.15@34.816,5 P4.16@36.616,5 P4.17@38.416,5 P4.18@40.216,5 P4.19@42.016,5 P4.20@43.816,5 P4.21@45.616,5 P4.22@47.416,5 P4.23@57.27,5 P4.24@59.07,5 P4.25@60.87,5 P4.26@62.67,5 SW1.0 U1.44
copper on no net:
  other v1: 21.369,19.148

## Polygon pours and split planes (outlines as drawn)
GND on Bottom Layer "Bottom_Layer-GND" (solid, remove dead copper, pour order 2): 66.05,-1.55 -1.539,-1.55 -1.539,25.221 66.05,25.221
GND on Top Layer "Top_Layer-GND" (solid, remove dead copper, pour order 0): 66.05,8.513 -1.539,8.513 -1.539,25.221 66.05,25.221

## Keep-outs
Keep-Out Layer:
  the board outline again, w0.013

## Other copper
Top Layer:
  pour cut-out: 64.768,25.668 59.103,25.668 59.103,8.508 64.768,8.508
  pour cut-out: 51.102,12.013 48.359,12.013 48.359,14.909 51.102,14.909
Bottom Layer:
  pour cut-out: 64.768,25.668 59.103,25.668 59.103,8.508 64.768,8.508

## Silkscreen, mask and mechanical layers (free items; w line width, h text height)
Bottom Overlay:
  drawing of 930 lines, arcs and shapes, not listed
  text "'.PCBNumber'" at 5.395,2.082 h2.03
  text "Pb" at 63.231,1.828 h3.05
  text "'.PCBRevision'" at 5.259,0.761 h0.76
Mechanical 1:
  the board outline again, w0.013
Mechanical 3:
  region: 72.14,0 71.973,1 72.306,1
  region: 72.306,22.1 71.973,22.1 72.14,23.1
  region: 64.3,34.985 63.3,34.819 63.3,35.152
  region: 1,34.819 0,34.985 1,35.152
  lines w0.013: 0,23.6 0,35.485 ; 1,34.985 63.3,34.985 ; 64.3,23.6 64.3,35.485 ; 64.8,0 72.64,0 ; 64.8,23.1 72.64,23.1 ; 72.14,1 72.14,22.1
  text "64.30" at 32.15,35.285 h1.5
  text "23.10" at 71.09,10.8 h1.5 r90
Mechanical 5:
  drawing of 154 lines, arcs and shapes, not listed
  text "1.20" at 96.462,24.377 h1.5
  text "Power connector}" at -27.808,11.738 h1.5
  text "LED}" at 22.437,11.521 h1.5
  text "Carbon}" at -18.122,1.885 h1.5
  text "S10,S11,S17,S7,S8,S6,S5,S4,S3,S2,S15,S1,S14,S12,S13,S9,S16,S0,R7,R6,R4,R5,R3,R2,R1,R0" at -10.974,-5.683 h1.15
  text "Height limitation 7.0mm}" at 8.595,-16.74 h1.5
Mechanical 6:
  circle w0.013: c57.866,-58.014 r1.3
  lines w0.013: 0,-47.444 64.3,-47.416 ; 3.347,-61.014 3.346,-59.027 4.046,-59.027 4.047,-61.014 ; 4.187,-61.014 47.096,-71.166 ; 33.087,-61.014 33.086,-59.014 33.786,-59.014 33.787,-61.014 48.096,-71.166 57.63,-61.014 ; 57.567,-61.014 57.566,-59.279 ; 58.166,-59.279 58.167,-61.014 ; 63.437,-42.34 68.242,-36.027 ; 0,-61.014 64.3,-61.014 64.3,-37.914 0,-37.914 0,-61.014 ; 9.77,-46.264 cw(c9.77,-42.914) 9.77,-39.564 10.37,-39.564 cw(c10.37,-42.914) 10.37,-46.264 9.77,-46.264 ; 52.07,-46.264 cw(c52.07,-42.914) 52.07,-39.564 52.67,-39.564 cw(c52.67,-42.914) 52.67,-46.264 52.07,-46.264
  text "Bottom" at 26.145,-34.959 h1.5
  text "Can't place component}" at 68.969,-35.264 h1.5
  text "Height limitation 8.0mm}" at 8.696,-51.544 h1.5
  text "Can't place component}" at 50.521,-70.393 h1.5